# Altium PCB PCB1.PcbDoc
Units mil, origin at the board's own origin, x right, y up, seen from the top; angles counter-clockwise.
Board outline 5000 x 4000 mil, 2 copper layers (Top Layer, Bottom Layer); 45 components, 35 nets, 202 pads, 0 vias.
Unrouted connection lines stored in the file: 142.
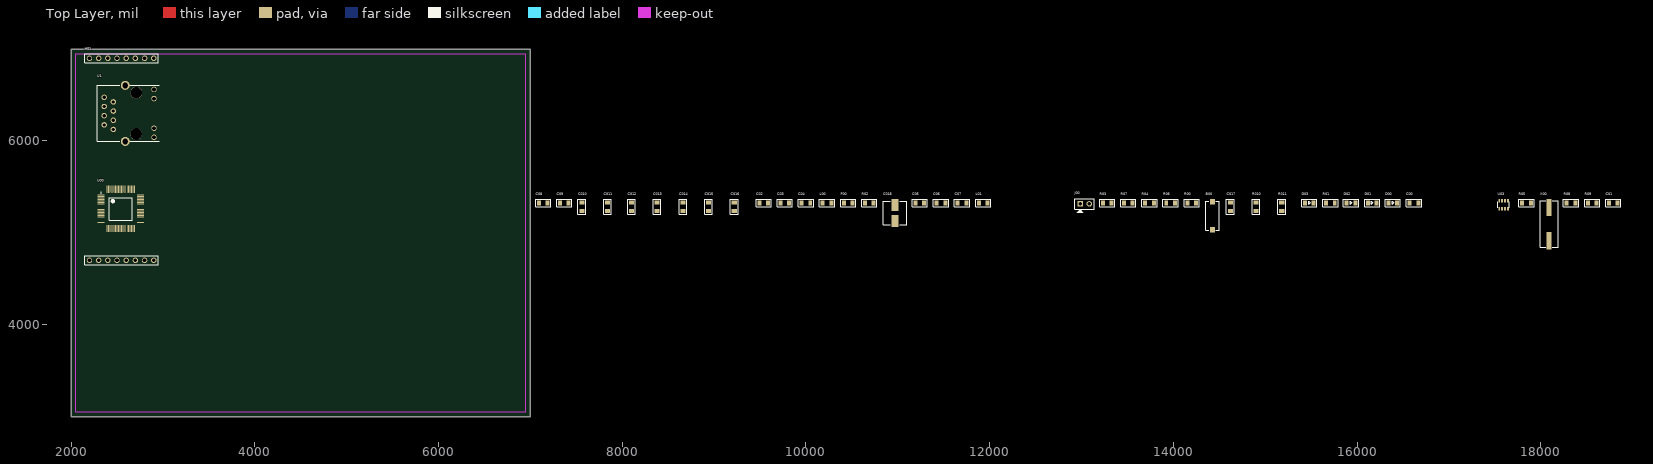
[diagram p0: Top Layer view]
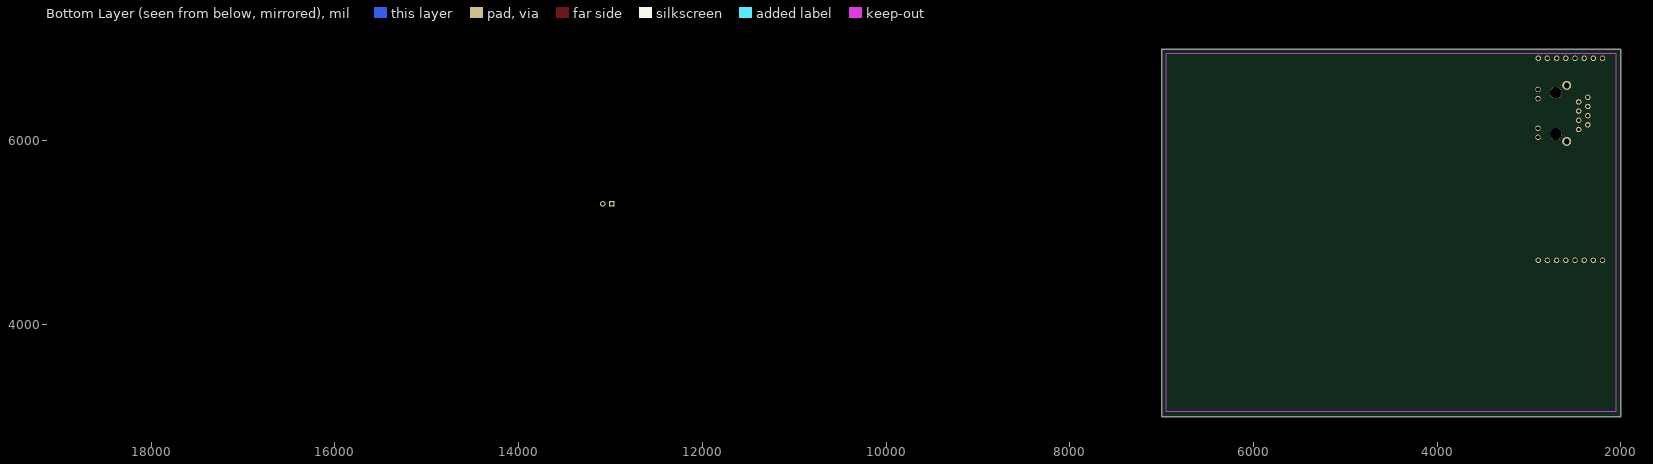
[diagram p1: Bottom Layer view, seen from below]

## Layer stack, top to bottom
Top Layer: signal copper 1.4
Dielectric: dielectric 12.6, FR-4, Dk 4.8
Bottom Layer: signal copper 1.4

## Board outline
2000,3000 7000,3000 7000,7000 2000,7000

## Design rules (kind name [scope] priority, off if disabled: settings)
Clearance [All] p1: gap=7
PolygonConnect [All] p1: connectstyle=Relief reliefconductorwidth=10 reliefentries=4 polygonreliefangle="90 Angle" airgapwidth=10
RoutingVias [All] p1: holewidth=25 width=40 viastyle="Through Hole" minholewidth=28 minwidth=50 maxholewidth=28 maxwidth=50
SolderMaskExpansion [All] p1: expansion=4
Width [All] p1: maxlimit=8 minlimit=8 preferedwidth=8
28 further rules are at their usual default settings.

## Components (designator, comment, footprint, x,y, rotation, side; value= is the part's Value field where it differs from the comment)
B00 "SW" SW2SMD 14425,5185 r90 top
C00 "C_Ceramic" SM_0805_C_CERAMIC 16620,5325 r0 top
C01 "C_Ceramic" SM_0805_C_CERAMIC 18790,5325 r0 top
C02 "C_Ceramic" SM_0805_C_CERAMIC 9540,5325 r0 top
C03 "C_Ceramic" SM_0805_C_CERAMIC 9770,5325 r0 top
C04 "C_Ceramic" SM_0805_C_CERAMIC 10000,5325 r0 top
C05 "C_Ceramic" SM_0805_C_CERAMIC 11240,5325 r0 top
C06 "C_Ceramic" SM_0805_C_CERAMIC 11470,5325 r0 top
C07 "C_Ceramic" SM_0805_C_CERAMIC 11700,5325 r0 top
C08 "C_Ceramic" SM_0805_C_CERAMIC 7140,5325 r0 top
C09 "C_Ceramic" SM_0805_C_CERAMIC 7370,5325 r0 top
C010 "C_Ceramic" SM_0805_C_CERAMIC 7560,5285 r90 top
C011 "C_Ceramic" SM_0805_C_CERAMIC 7840,5285 r90 top
C012 "C_Ceramic" SM_0805_C_CERAMIC 8100,5285 r90 top
C013 "C_Ceramic" SM_0805_C_CERAMIC 8380,5285 r90 top
C014 "C_Ceramic" SM_0805_C_CERAMIC 8660,5285 r90 top
C015 "C_Ceramic" SM_0805_C_CERAMIC 8940,5285 r90 top
C016 "C_Ceramic" SM_0805_C_CERAMIC 9220,5285 r90 top
C017 "C_Ceramic" SM_0805_C_CERAMIC 14620,5285 r90 top
C018 "C_Ceramic" Cap-Alu-D8 10970,5215 r0 top
D00 "LED" SM_0805_LED 16390,5325 r0 top
D01 "LED" SM_0805_LED 16165,5325 r0 top
D02 "LED" SM_0805_LED 15935,5325 r0 top
D03 "LED" SM_0805_LED 15480,5325 r0 top
F00 "R" SM_0805_R 10460,5325 r0 top
H01 "MBoard1_BH_DualPorts" MBoard1_BH_DualPorts 2200,6900 r0 top
J00 "Jumper 2" Hed2 12985,5315 r0 top
L00 "1uH/250mA" SM_0805_R 10230,5325 r0 top
L01 "1uH/250mA" SM_0805_R 11930,5325 r0 top
R00 "R" SM_0805_R 14200,5325 r0 top
R01 "R" SM_0805_R 15710,5325 r0 top
R02 "R" SM_0805_R 10690,5325 r0 top
R03 "R" SM_0805_R 13280,5325 r0 top
R04 "R" SM_0805_R 13740,5325 r0 top
R05 "R" SM_0805_R 17845,5325 r0 top
R06 "R" SM_0805_R 13970,5325 r0 top
R07 "R" SM_0805_R 13510,5325 r0 top
R08 "R" SM_0805_R 18330,5325 r0 top
R09 "R" SM_0805_R 18560,5325 r0 top
R010 "R" SM_0805_R 14900,5285 r90 top
R011 "R" SM_0805_R 15180,5285 r90 top
U00 "W5100" LQFP80 2540,5260 r0 top
U1 "RJ45-Cont" RJ45-Cont 2360,6300 r270 top
U03 "1K" RA4 17595,5305 r0 top
X00 "25MHz" HC49/US-SMD 18090,5095 r90 top

## Footprints (in the part's own frame and the unit in brackets; to place one, negate y for a bottom-side part, rotate by r counter-clockwise, add the part's x,y. Pads: shape width x height; smd on the part's side, far side on the other; paste and mask are expansions set on the pad)
Cap-Alu-D8 [mm] "Size D8, 100uF."
  rect 2x3.4 smd: 1(0,-2.2) 2(0,2.2)
  silkscreen extent -3.3,-3.3 3.3,3.3, body extent -3.3,-3.5 3.3,3.5, height 7.7
HC49/US-SMD [mm]
  rect 4.8x1.5 smd: 1(-4.6,0) 2(4.6,0)
  silkscreen extent -6.48,-2.54 6.48,2.41, body extent -6.35,-2.41 6.35,2.29, height 4.2
Hed2 [mil]
  rect 60x60 hole 39.37: 1(0,0)
  round 60 hole 39.37: 2(100,0)
  silkscreen extent -58,-96 155,56
LQFP80 [mm] "TSQFP, 80-Leads, Body 10.00x10.00mm, Pitch 0.40mm, IPC Medium Density"
  oval 2x0.203 smd: 1(-5.45,3.8) 2(-5.45,3.4) 3(-5.45,3) 4(-5.45,2.6) 5(-5.45,2.2) 6(-5.45,1.8) 7(-5.45,1.4) 8(-5.45,1) 9(-5.45,0.6) 10(-5.45,0.2) 11(-5.45,-0.2) 12(-5.45,-0.6) 13(-5.45,-1) 14(-5.45,-1.4) 15(-5.45,-1.8) 16(-5.45,-2.2) 17(-5.45,-2.6) 18(-5.45,-3) 19(-5.45,-3.4) 20(-5.45,-3.8) 41(5.45,-3.8) 42(5.45,-3.4) 43(5.45,-3) 44(5.45,-2.6) 45(5.45,-2.2) 46(5.45,-1.8) 47(5.45,-1.4) 48(5.45,-1) 49(5.45,-0.6) 50(5.45,-0.2) 51(5.45,0.2) 52(5.45,0.6) 53(5.45,1) 54(5.45,1.4) 55(5.45,1.8) 56(5.45,2.2) 57(5.45,2.6) 58(5.45,3) 59(5.45,3.4) 60(5.45,3.8)
  oval 0.203x2 smd: 21(-3.8,-5.45) 22(-3.4,-5.45) 23(-3,-5.45) 24(-2.6,-5.45) 25(-2.2,-5.45) 26(-1.8,-5.45) 27(-1.4,-5.45) 28(-1,-5.45) 29(-0.6,-5.45) 30(-0.2,-5.45) 31(0.2,-5.45) 32(0.6,-5.45) 33(1,-5.45) 34(1.4,-5.45) 35(1.8,-5.45) 36(2.2,-5.45) 37(2.6,-5.45) 38(3,-5.45) 39(3.4,-5.45) 40(3.8,-5.45) 61(3.8,5.45) 62(3.4,5.45) 63(3,5.45) 64(2.6,5.45) 65(2.2,5.45) 66(1.8,5.45) 67(1.4,5.45) 68(1,5.45) 69(0.6,5.45) 70(0.2,5.45) 71(-0.2,5.45) 72(-0.6,5.45) 73(-1,5.45) 74(-1.4,5.45) 75(-1.8,5.45) 76(-2.2,5.45) 77(-2.6,5.45) 78(-3,5.45) 79(-3.4,5.45) 80(-3.8,5.45)
  silkscreen extent -5.57,-3.15 3.15,4.62, body extent -6.01,-6.01 6.01,6.01, height 1.6
MBoard1_BH_DualPorts [mm]
  round 1.5 hole 1.02: 1(0,0) 2(2.54,0) 3(5.08,0) 4(7.62,0) 5(10.16,0) 6(12.7,0) 7(15.24,0) 8(17.78,0) 9(17.78,-55.88) 10(15.24,-55.88) 11(12.7,-55.88) 12(10.16,-55.88) 13(7.62,-55.88) 14(5.08,-55.88) 15(2.54,-55.88) 16(0,-55.88)
  silkscreen extent -1.27,-57.15 19.05,1.27, body extent -1.27,-57.15 19.05,1.27, height 8
RA4 [mm] "Resistor Array (0603x4) form TME"
  rect 0.5x1 smd: 1(-1.2,-1.1) 2(-1.2,1.1) 3(-0.4,-1.1) 4(-0.4,1.1) 5(0.4,-1.1) 6(0.4,1.1) 7(1.2,-1.1) 8(1.2,1.1)
  silkscreen extent -1.6,-0.8 1.6,0.8, body extent -1.6,-0.8 1.6,0.8, height 0.5
RJ45-Cont [mm]
  round 3.25 hole 3.25: 0(-5.715,8.89) 0(5.715,8.89)
  round 1.5 hole 0.89: 1(4.445,2.54) 2(3.175,0) 3(1.905,2.54) 4(0.635,0) 5(-0.635,2.54) 6(-1.905,0) 7(-3.175,2.54) 8(-4.445,0)
  round 1.5 hole 1.02: 9(6.625,13.79) 10(4.085,13.79) 11(-4.085,13.79) 12(-6.625,13.79)
  round 2.5 hole 1.63: 13(-7.745,5.84) 14(7.745,5.84)
  silkscreen extent -7.75,-1.91 7.75,15.24, body extent -7.94,-1.59 7.94,19.81, height 14
SM_0805_C_CERAMIC [mm] "General Surface-mount cap, low density"
  rect 1.1x1.4 smd: 1(-1.2,0) 2(1.2,0)
  silkscreen extent -2.1,-1.05 2.1,1.05, body extent -1,-0.62 1,0.63, height 0.58
SM_0805_LED [mm] "General polarized surface-mount Led, low density"
  rect 1.1x1.4 smd: 1(-1.2,0) 2(1.2,0)
  silkscreen extent -2.1,-1.05 2.1,1.05, body extent -1.01,-0.62 1.01,0.63, height 1.1
SM_0805_R [mm] "General Surface-mount resistor, low density"
  rect 1.1x1.4 smd: 1(-1.2,0) 2(1.2,0)
  silkscreen extent -2.1,-1.05 2.1,1.05, body extent -1,-0.63 1,0.62, height 0.45
SW2SMD [mm]
  rect 1.5x1.4 smd: 1(-3.9,0) 2(3.9,0)
  silkscreen extent -4,-1.85 4,1.85, body extent -4,-1.8 4,1.8, height 2.5

## Part data
B00: library part SW2, "Switch button 2 pin"
C00 C01 C02 C03 C04 C05 C06 C07 C08 C09 C010 C011 C012 C013 C014 C015 C016 C017 C018: "Non-polarity ceramic capacitor"
F00 R00 R01 R02 R03 R04 R05 R06 R07 R08 R09 R010 R011: "Resistor"
J00: library part "JP 2"
L00 L01: library part L1, "Inductor"
U03: library part RA4
X00: library part XT2, "Crystal For all Crystal 2pin."

## Nets (pads, with @x,y where several pads share a name; then routed paths per layer and width w, separated by ;. In a path a pad name is that pad's centre, name@x,y a point inside that pad or via, vN(x,y) a via of type N, cw(c..) or ccw(c..) an arc to the next point about the centre after c; other vN are vias at no path point)
1V8_OUT: C02.2 C03.2 C08.2 C09.2 C010.2 C011.2 L00.1 U00.11 U00.15 U00.16 U00.33 U00.69
1V8A: C04.2 C012.2 C013.2 L00.2 U00.7 U00.74
3V3: C05.2 C014.2 C015.2 C016.2 C018.2 H01.1 H01.9 L01.1 R02.1 R03.1 R04.1 U00.12 U00.18 U00.44 U03.2 U03.4 U03.6 U03.8
3V3A: C06.2 C07.2 C017.2 L01.2 R06.2 R07.2 U00.2 U1.4 U1.5
COLLED: D01.2 U00.71
FDXLED: U00.70 U1.11
GND: B00.2 C00.1 C01.1 C02.1 C03.1 C04.1 C05.1 C08.1 C09.1 C010.1 C011.1 C012.1 C013.1 C014.1 C015.1 C016.1 C018.1 F00.2 H01.2 H01.10 U00.13 U00.14 U00.17 U00.32 U00.34 U00.35 U00.36 U00.37 U00.38 U00.39 U00.40 U00.41 U00.42 U00.43 U00.45 U00.46 U00.47 U00.48 U00.49 U00.50 U00.51 U00.52 U00.53 U00.54 U00.63 U00.64 U00.65 U00.68 U1.8 U1.13 U1.14
GNDA: C06.1 C07.1 C017.1 F00.1 R01.2 R08.2 R09.2 R010.1 R011.1 U00.4 U00.10 U00.77
INT: H01.15 J00.2
LINKLED: U00.66 U1.10
MISO: H01.12 U00.27
MOSI: H01.11 U00.28
NetB00_1: B00.1 R04.2 U00.59
NetC00_2: C00.2 R05.2 U00.76 X00.2
NetC01_2: C01.2 R05.1 U00.75 X00.1
NetD00_1: D00.1 U03.7
NetD01_1: D01.1 U03.5
NetD02_1: D02.1 U03.3
NetD03_1: D03.1 U03.1
NetJ00_1: J00.1 U00.56
NetR00_1: R00.1 U00.1
NetR00_2: R00.2 R01.1
NetR02_2: R02.2 U00.31
NetR03_2: R03.2 U00.55 U00.57 U00.58
NetR06_1: R06.1 U1.9
NetR07_1: R07.1 U1.12
RXIN: R08.1 U00.6 U1.6
RXIP: R09.1 U00.5 U1.3
RXLED: D03.2 U00.72
SCLK: H01.13 U00.30
SCS: H01.14 U00.29
SPDLED: D00.2 U00.67
TXLED: D02.2 U00.73
TXON: R010.2 U00.9 U1.2
TXOP: R011.2 U00.8 U1.1
pads on no net: H01.3 H01.4 H01.5 H01.6 H01.7 H01.8 H01.16 U00.3 U00.19 U00.20 U00.21 U00.22 U00.23 U00.24 U00.25 U00.26 U00.60 U00.61 U00.62 U00.78 U00.79 U00.80 U1.0 U1.7

## Keep-outs
Keep-Out Layer:
  lines w10: 2050,3050 2050,6950 6950,6950 6950,3050 2050,3050

## Silkscreen, mask and mechanical layers (free items; w line width, h text height)
Drill Drawing:
  text ".LEGEND" at 7200,3200 h60
  text "Drill Drawing." at 7200,3100 h60

## Dimensions
2050,3050 to 2050,6950 on Mechanical 1
2050,3050 to 6950,3050 on Mechanical 1